# Altium PCB PCB.PcbDoc
Units mil, origin at the board's own origin, x right, y up, seen from the top; angles counter-clockwise.
Board outline 6000 x 4000 mil, 2 copper layers (Top Layer, Bottom Layer); 22 components, 26 nets, 109 pads, 2 vias.
Unrouted connection lines stored in the file: 15.
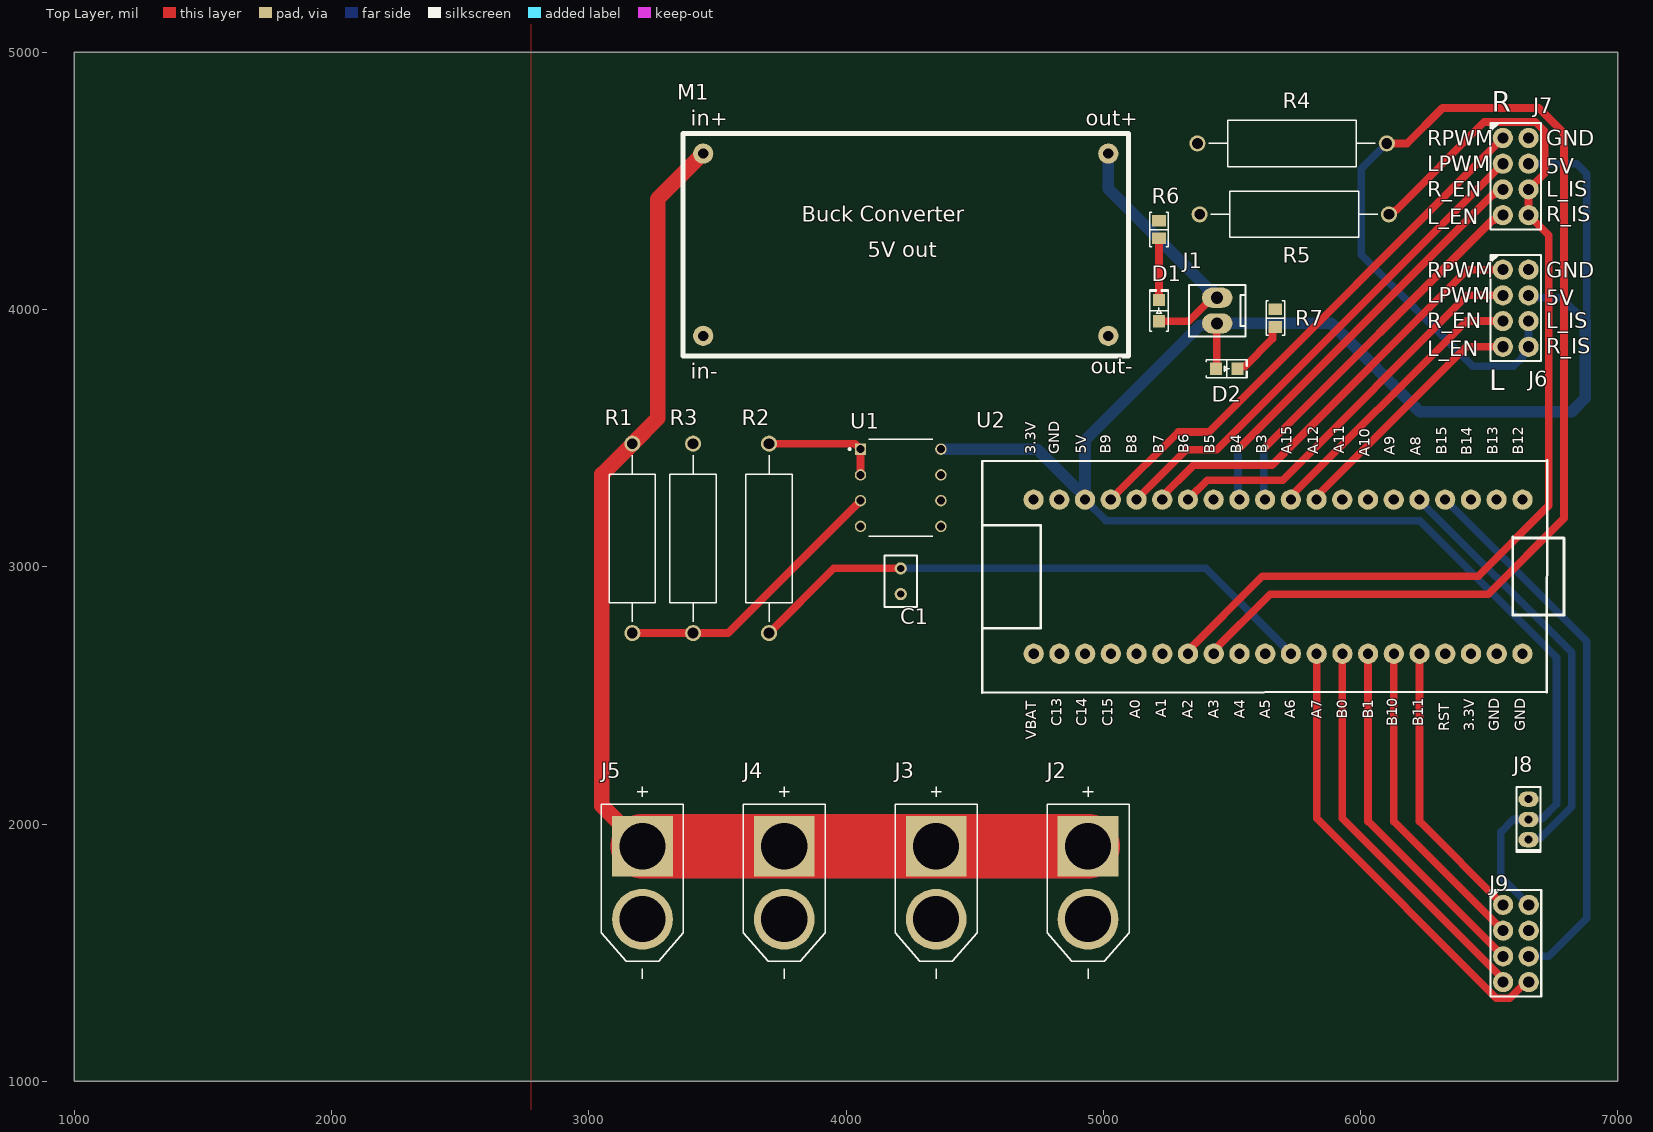
[diagram p0: Top Layer view]
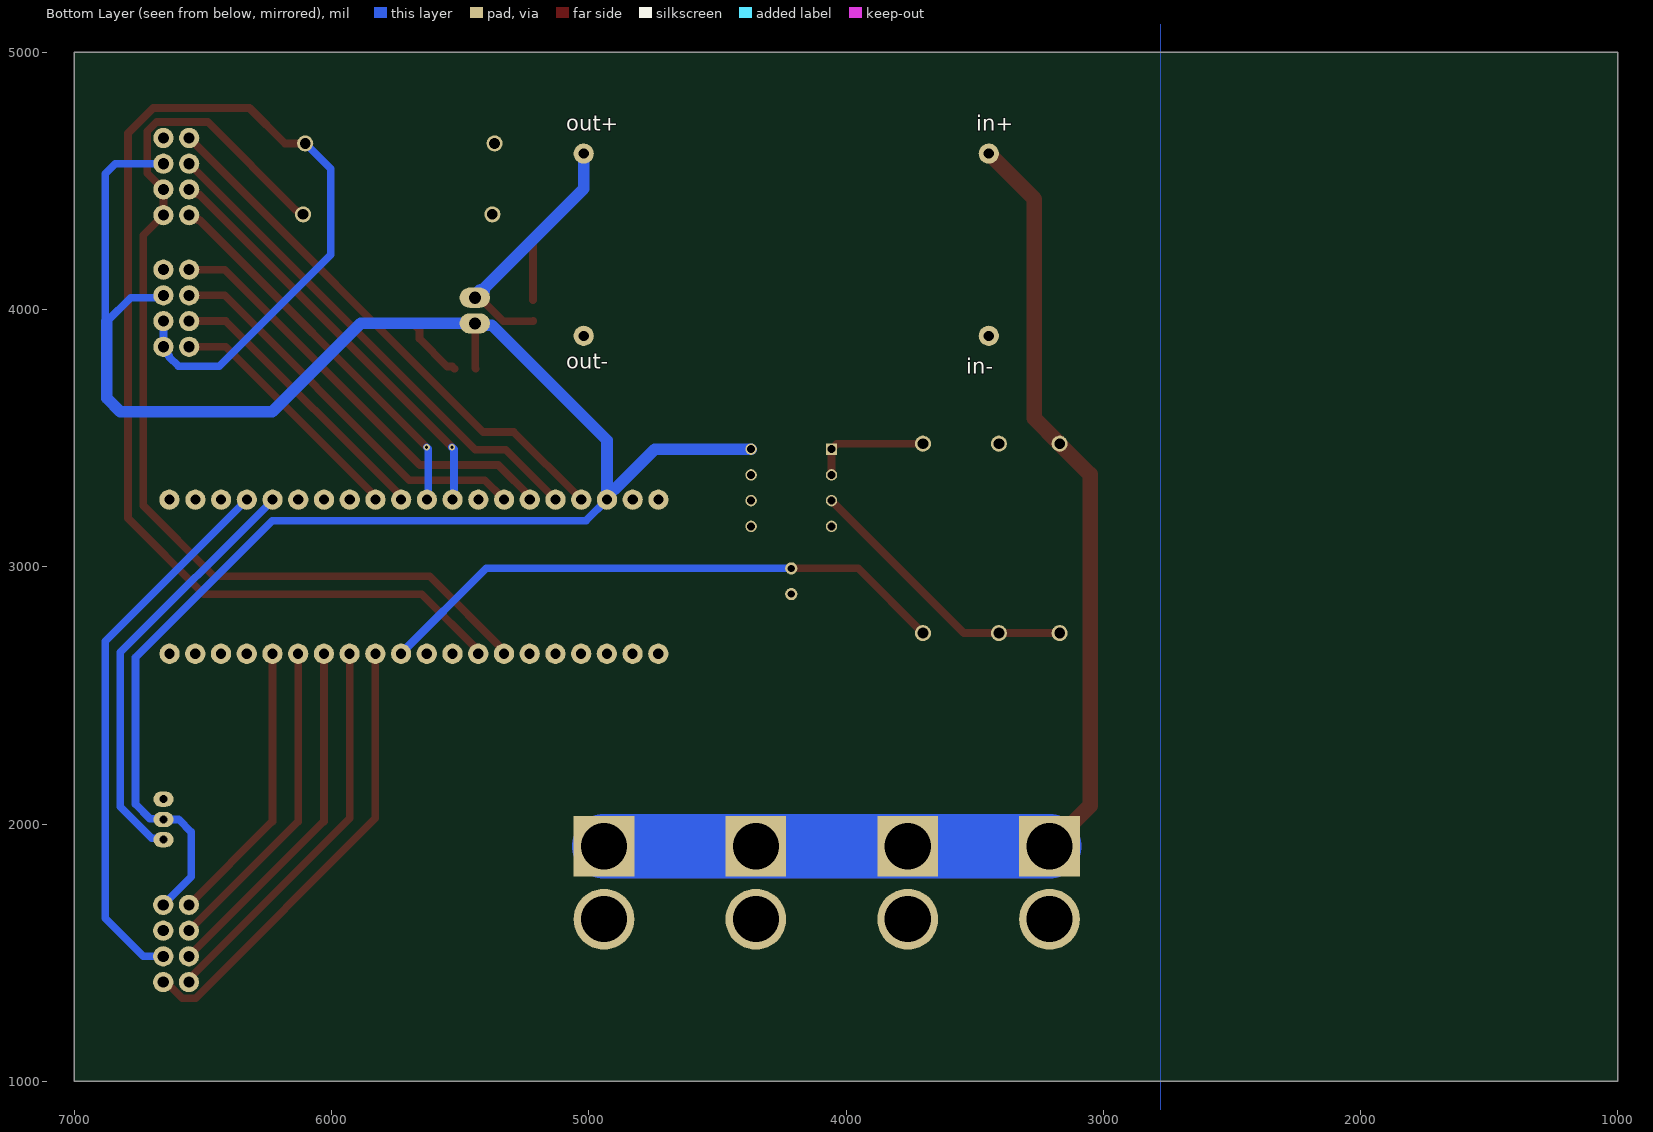
[diagram p1: Bottom Layer view, seen from below]
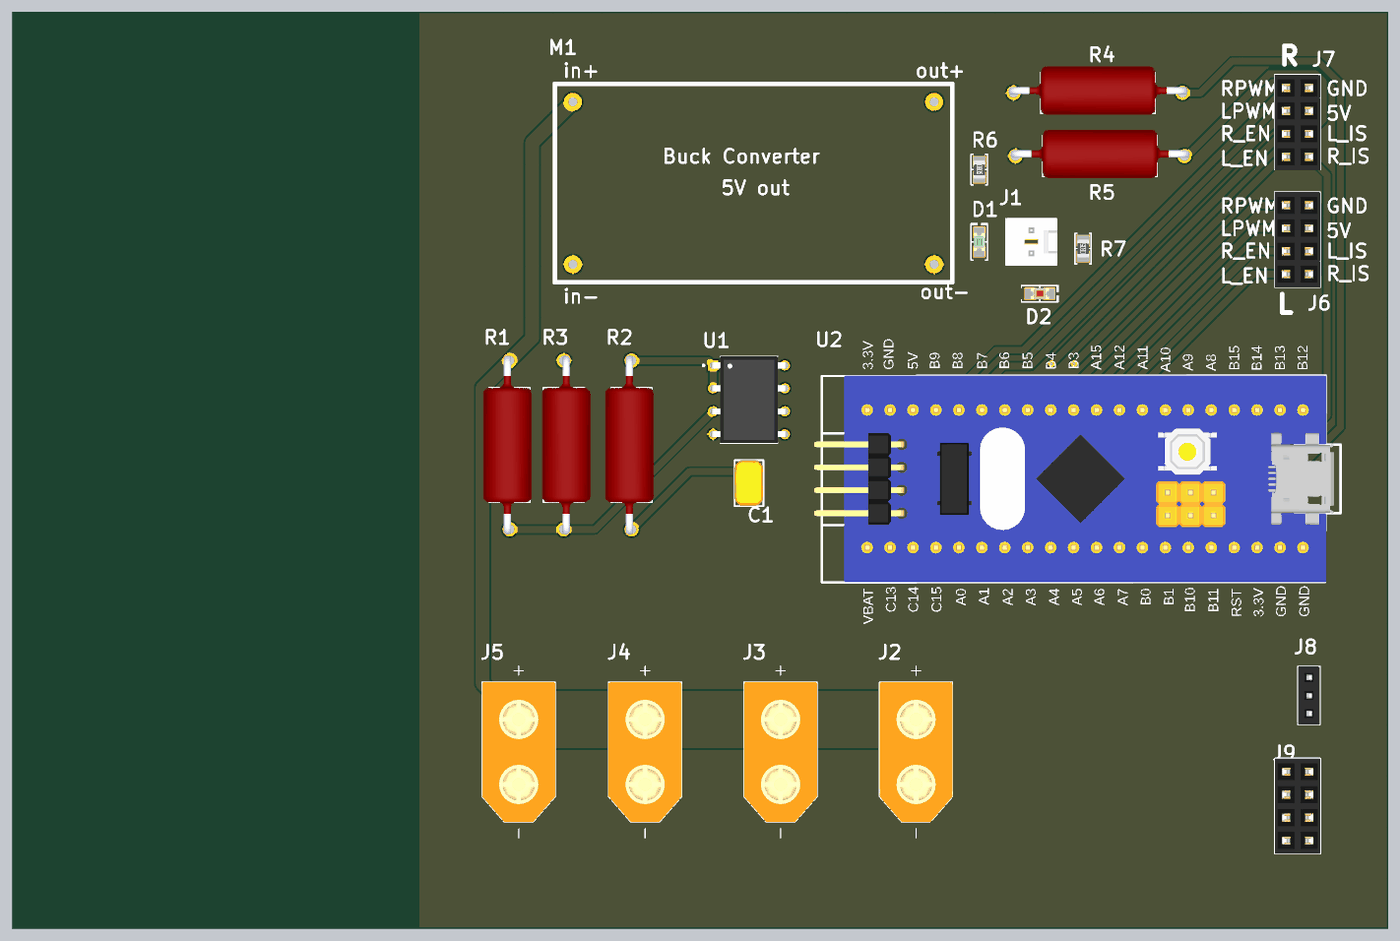
[diagram p2: 3D render of the assembled board from above, using the file's embedded part models]

## Layer stack, top to bottom
Top Solder: solder mask 0.4, Solder Resist, Dk 3.5
Top Layer: signal copper 1.4
Dielectric 1: dielectric 12.6, FR-4, Dk 4.8
Bottom Layer: signal copper 1.4
Bottom Solder: solder mask 0.4, Solder Resist, Dk 3.5

## Board outline
1000,1000 7000,1000 7000,5000 1000,5000

## Design rules (kind name [scope] priority, off if disabled: settings)
BoardOutlineClearance [All] p1: gap=7.87 ignorepadtopadclearanceinfootprint=FALSE
Clearance [All] p1: gap=8 ignorepadtopadclearanceinfootprint=FALSE except(9.84: Arc-Hole Track-Hole SMDPad-Hole THPad-Hole Via-Hole Fill-Hole Poly-Hole Region-Hole Text-Hole)
ComponentClearance [All] p1: gap=5 collisioncheckmode=3 verticalgap=5 showdistances=TRUE
DiffPairsRouting [All] p1: maxlimit=15 minlimit=8 mostfreqgap=8 toplayer_minwidth=8 toplayer_maxwidth=1000 toplayer_prefwidth=8 bottomlayer_minwidth=8 bottomlayer_maxwidth=1000 bottomlayer_prefwidth=8 maxuncoupledlength=500
Height [All] p1: minheight=0 maxheight=71497.94 prefheight=500
HoleSize [All] p1: absolutevalues=TRUE maxlimit=248.03 minlimit=11.81 maxpercent=80.000 minpercent=20.000
HoleToHoleClearance [All] p1: gap=9.84 allowstackedmicrovias=FALSE
MinimumAnnularRing [All] p1: minimumring=3
MinimumSolderMaskSliver [All] p1: minsoldermaskwidth=0
PlaneClearance [All] p1: clearance=8
PlaneConnect PlaneConnectPowerPads [InPadClass('PowerPads')] p1: planeconnectstyle=Direct reliefexpansion=20 reliefentries=4 reliefconductorwidth=10 reliefairgap=10
PlaneConnect [All] p2: pad.planeconnectstyle=Relief pad.reliefexpansion=11.81 pad.reliefentries=4 pad.reliefconductorwidth=8 pad.reliefairgap=8 via.planeconnectstyle=Direct via.reliefexpansion=11.81 via.reliefentries=4 via.reliefconductorwidth=5 via.reliefairgap=5
PolygonConnect PolygonConnectPowerPads [All vs (InPadClass('PowerPads'))] p1: connectstyle=Direct reliefconductorwidth=10 reliefentries=4 polygonreliefangle="90 Angle" airgapwidth=10
PolygonConnect [All] p2: thpad.connectstyle=Relief thpad.reliefconductorwidth=8 thpad.reliefentries=4 thpad.polygonreliefangle="90 Angle" thpad.airgapwidth=8 smdpad.connectstyle=Relief smdpad.reliefconductorwidth=8 smdpad.reliefentries=4 smdpad.polygonreliefangle="90 Angle" smdpad.airgapwidth=8 via.connectstyle=Direct via.reliefconductorwidth=5 via.reliefentries=4 via.polygonreliefangle="90 Angle" via.airgapwidth=5
RoutingVias [All] p1: holewidth=11.81 width=23.62 viastyle="Through Hole" minholewidth=11.81 minwidth=23.62 maxholewidth=23.62 maxwidth=259.84
SilkToSilkClearance [All] p1: silktosilkclearance=0
SilkToSolderMaskClearance [IsPad] p1: minsilkscreentomaskgap=5 clearancetoexposedcopper=TRUE
SolderMaskExpansion [All] p1: expansion=2.95 istentingtop=FALSE
SupplyNets "Schematic Supply Nets" [InNet('GND')] p1: voltage=0.000
Width [All] p1: maxlimit=1000 minlimit=8 preferedwidth=30 minimp=50.000000 maximp=50.000000 favimp=50.000000
20 further rules are at their usual default settings.

## Components (designator, comment, footprint, x,y, rotation, side; value= is the part's Value field where it differs from the comment)
C1 "100nF" C320C 4212.01,2944.29 r90 top
D1 "Green" "LED 0805_2012 GREEN" 5216.54,3996.06 r90 top
D2 "Red" "LED 0805_2012 RED" 5480.31,3769.68 r0 top
J1 "0022272021" "MOLEX KK 0022272021" 5442.91,3996.06 r90 top
J2 "PowerIn" AMASS_XT60-M 4940.94,1771.65 r270 top
J3 "MotorR" AMASS_XT60-M 4350.39,1771.65 r270 top
J4 "MotorL" AMASS_XT60-M 3759.84,1771.65 r270 top
J5 "ESC" AMASS_XT60-M 3208.66,1771.65 r270 top
J6 "MotorR" "HARWIN M20-7830445" 6603.54,4005.12 r0 top
J7 "MotorL" "HARWIN M20-7830445" 6603.54,4516.93 r0 top
J8 "NPPN031BFCN-RC" "SULLINS NPPN031BFCN" 6653.54,2017.72 r90 top
J9 "M20-7830442" "HARWIN M20-7830445" 6604.33,1535.43 r0 top
M1 "LM2596S" LM2596S 4232.28,4251.97 r0 top
R1 "150K" RESAD1869W81L1270D457 3169.29,3110.24 r90 top
R2 "1K" RESAD1869W81L1270D457 3700.79,3110.24 r90 top
R3 "20K" RESAD1869W81L1270D457 3405.51,3110.24 r270 top
R4 "10K" RESAD1869W81L1270D457 5734.31,4645.67 r0 top
R5 "10K" RESAD1869W81L1270D457 5742.76,4370.08 r0 top
R6 "220 Ohms" "RES 0805_2012" 5216.54,4311.02 r270 top
R7 "220 Ohms" "RES 0805_2012" 5669.29,3966.54 r90 top
U1 "TL072CPE4" DIP794W45P254L959H508Q8 4212.6,3307.09 r0 top
U2 "STM32F103C8T6" "STM32 BLUEPILL" 5452.76,2952.76 r90 top

## Footprints (in the part's own frame and the unit in brackets; to place one, negate y for a bottom-side part, rotate by r counter-clockwise, add the part's x,y. Pads: shape width x height; smd on the part's side, far side on the other; paste and mask are expansions set on the pad)
AMASS_XT60-M [mm]
  round 6 hole 4.55: N(3.6,0)
  rect 6x6 / inner round 6 / far side rect 6x6 hole 4.55: P(-3.6,0)
  silkscreen extent -9.5,-4.05 9.5,4.05, body extent -7.75,-4.05 7.75,4.05, height 16
C320C [mm]
  round 1.21 hole 0.71: 1(-1.285,-0.015) 2(1.255,-0.015)
  silkscreen extent -2.56,-1.61 2.52,1.58, body extent -2.54,-1.59 2.54,1.59, height 6.34
DIP794W45P254L959H508Q8 [mm]
  rect 1.13x1.13 / inner round 1.13 / far side rect 1.13x1.13 hole 0.78 mask+0.102: 1(-3.97,3.81)
  round 1.13 hole 0.78 mask+0.102: 2(-3.97,1.27) 3(-3.97,-1.27) 4(-3.97,-3.81) 5(3.97,-3.81) 6(3.97,-1.27) 7(3.97,1.27) 8(3.97,3.81)
  silkscreen extent -5.13,-4.79 3.17,4.79, body extent -4.15,-4.79 4.15,4.79, height 5.08
"HARWIN M20-7830445" [mm] "2.54mm DIL PC TAIL PIN HEADER ASSEMBLY"
  round 2 hole 1.1: 1(-1.27,3.81) 2(-1.27,1.27) 3(-1.27,-1.27) 4(-1.27,-3.81) 5(1.27,-3.81) 6(1.27,-1.27) 7(1.27,1.27) 8(1.27,3.81)
  silkscreen extent -2.5,-5.23 2.5,5.27, body extent -2.52,-5.28 2.52,5.28, height 8.5
"LED 0805_2012 GREEN" [mm] "Chip Diode, 2-Leads, Body 2.00x1.25mm, IPC Medium Density"
  rect 1.2x1.2 smd: 1(-1.05,0) 2(1.05,0)
  silkscreen extent -2.03,-0.9 2.03,0.9, body extent -1,-0.62 1,0.63, height 0.9
"LED 0805_2012 RED" [mm] "Chip Diode, 2-Leads, Body 2.00x1.25mm, IPC Medium Density"
  rect 1.2x1.2 smd: 1(-1.05,0) 2(1.05,0)
  silkscreen extent -2.03,-0.9 2.03,0.9, body extent -1,-0.62 1,0.63, height 0.9
LM2596S [mm]
  round 2 hole 1: 1(-20,9) 2(-20,-9) 3(20,9) 4(20,-9)
  silkscreen extent -22,-11 22,11
"MOLEX KK 0022272021" [mm]
  oval 2x3 hole 1.2: 1(-1.27,0) 2(1.27,0)
  silkscreen extent -2.54,-2.79 2.54,2.79, body extent -2.54,-2.9 2.54,2.9, height 11.7
"RES 0805_2012" [mm] "Chip Resistor, 2-Leads, Body 2.00x1.25mm, IPC Medium Density"
  rect 1.15x1.35 smd: 1(-0.875,0) 2(0.875,0)
  silkscreen extent -1.7,-0.9 1.7,0.9, body extent -1,-0.62 1,0.63, height 0.6
RESAD1869W81L1270D457 [mm]
  round 1.59 hole 1.06: 1(-9.349,0) 2(9.349,0)
  silkscreen extent -8.23,-2.28 8.23,2.28, body extent -9.93,-2.44 9.93,2.95, height 5.38
"STM32 BLUEPILL" [mm]
  round 2 hole 1: 1(7.828,-29.909) 2(7.828,-27.343) 3(7.828,-24.803) 4(7.828,-22.263) 5(7.828,-19.723) 6(7.828,-17.183) 7(7.828,-14.643) 8(7.828,-12.103) 9(7.828,-9.563) 10(7.828,-7.023) 11(7.828,-4.483) 12(7.828,-1.943) 13(7.828,0.597) 14(7.828,3.137) 15(7.828,5.677) 16(7.828,8.217) 17(7.828,10.757) 18(7.828,13.297) 19(7.828,15.837) 20(7.828,18.377) 21(-7.386,18.366) 22(-7.386,15.826) 23(-7.386,13.286) 24(-7.386,10.746) 25(-7.386,8.206) 26(-7.386,5.666) 27(-7.386,3.126) 28(-7.386,0.586) 29(-7.386,-1.954) 30(-7.386,-4.494) 31(-7.386,-7.034) 32(-7.386,-9.574) 33(-7.386,-12.114) 34(-7.386,-14.654) 35(-7.386,-17.194) 36(-7.386,-19.734) 37(-7.386,-22.274) 38(-7.386,-24.814) 39(-7.386,-27.354) 40(-7.386,-29.894)
  silkscreen extent -11.22,-34 11.69,23.43, body extent -11.18,-33.27 11.68,24.29, height 12.31
"SULLINS NPPN031BFCN" [mm]
  oval 1.5x2 hole 0.8: 1(-2,0) 2(0,0) 3(2,0)
  silkscreen extent -3.2,-1.2 3.2,1.2, body extent -3.25,-1.2 3.25,1.2, height 4.41

## Part data
C1: library part C320C104M5U5TA, "C320 C 100nF Ceramic Multilayer Capacitor, 50 VDC, +85degC, Z5U Dielec, +/-20%", Package="Radial KEMET", Check_prices=https://www.snapeda.com/parts/C320C104M5U5TA/KEMET/view-part/?ref=eda, MF=KEMET, MP=C320C104M5U5TA, SnapEDA_Link=https://www.snapeda.com/parts/C320C104M5U5TA/KEMET/view-part/?ref=snap
D1: library part APHCM2012ZGC/G-F01, "LED GREEN CLEAR 2SMD", Current - Test=20mA, Device Package="0805 (2012 Metric)", Lens Color=Colorless, Manufacturer=Kingbright, Millicandela Rating=700mcd, Supplier Device Package=2-SMD, Supplier Part Number 1=754-2119-1-ND, Voltage - Forward (Vf) (Typ)=3.2V, Color=Green, ComponentLink1Description=Datasheet, ComponentLink1URL=http://www.kingbrightusa.com/images/catalog/SPEC/APHCM2012ZGC-G-F01.pdf, ComponentLink2Description="DigiKey Link", ComponentLink2URL=https://www.digikey.com/en/products/detail/kingbright/APHCM2012ZGC-G-F01/7318972, Configuration=Independent, Height (Max)=0.50mm, LastUpdated="2024-06-03 8:00:29 PM", Lens Size="1.25mm x 1.20mm", Lens Style="Rectangle with Flat Top", Lens Transparency=Clear, Lifecycle Status=Active, Minimum Order=1, Mounting Type="Surface Mount", Package / Case="0805 (2012 Metric)", Packaging=TapeAndReel, Part Number=APHCM2012ZGC/G-F01, Part Status=Active, PartId=255, Price=0.25, Series=-, Size / Dimension="2.00mm L x 1.25mm W", Supplier 1=DigiKey, Viewing Angle=110°, Wavelength - Dominant=525nm, Wavelength - Peak=520nm
D2: library part 5990110007F, "LED RED 0805 SMD", Current - Test=20mA, Device Package="0805 (2012 Metric)", Lens Color=0.80mm, Manufacturer=Dialight, Millicandela Rating=29mcd, Supplier Device Package=0805, Supplier Part Number 1=350-4353-1-ND, Voltage - Forward (Vf) (Typ)=2.1V, Color=Red, ComponentLink1Description=Datasheet, ComponentLink1URL=http://www.dialightsignalsandcomponents.com/Assets/Brochures_And_Catalogs/Indication/CBI_SMD_new/Dialight_CBI_data_599-0805_Apr2018.pdf, ComponentLink2Description="DigiKey Link", ComponentLink2URL=https://www.digikey.com/en/products/detail/dialight/5990110007F/9385408, Configuration=Standard, Height (Max)=0.80mm, LastUpdated="2024-06-03 8:00:07 PM", Lens Size="1.40mm x 1.25mm", Lens Style="Rectangle with Flat Top", Lifecycle Status=Active, Minimum Order=1, Mounting Type="Surface Mount", Package / Case="0805 (2012 Metric)", Packaging=TapeAndReel, Part Number=5990110007F, Part Status=Active, PartId=308, Price=0.04, Series=599, Size / Dimension="2.00mm L x 1.25mm W", Supplier 1=DigiKey, Viewing Angle=140°, Wavelength - Dominant=633nm
J1: "CONN HEADER VERT 2POS 2.54MM", Insulation Color=Natural, Manufacturer=Molex, Material Flammability Rating="UL94 V-0", Supplier Part Number 1=WM4111-ND, ComponentLink1Description=Datasheet, ComponentLink1URL=https://www.molex.com/pdm_docs/sd/022272021_sd.pdf, ComponentLink2Description="DigiKey Link", ComponentLink2URL=http://digikey.com/product-detail/en/molex/0022272021/WM4111-ND/1130577, Connector Type=Header, Contact Finish - Mating=Tin, Contact Finish - Post=Tin, Contact Finish Thickness - Mating="100.0µin (2.54µm)", Contact Length - Mating="0.295\" (7.49mm)", Contact Length - Post="0.140\" (3.56mm)", Contact Material=Brass, Contact Shape=Square, Contact Type="Male Pin", Fastening Type="Friction Lock", Insulation Height="0.461\" (11.70mm)", Insulation Material="Polyamide (PA), Nylon", LastUpdated="2020-01-12 11:51:43 PM", Lifecycle Status=Active, Minimum Order=1, Mounting Type="Through Hole", Number of Positions=2, Number of Positions Loaded=All, Number of Rows=1, Overall Contact Length="0.560\" (14.22mm)", Packaging=Bulk, Part Number=0022272021, Part Status=Active, PartId=76, Pitch - Mating="0.100\" (2.54mm)", Price=0.27, Series="KK 6410", Shrouding="Shrouded - 1 Wall", Style="Board to Cable/Wire", Supplier 1=DigiKey, Termination=Solder
J2 J3 J4 J5: library part XT60-M, "Plug; DC supply; XT60; male; PIN: 2; for cable; soldered; 30A; 500V", Package=Package, Check_prices=https://www.snapeda.com/parts/XT60-M/AMASS/view-part/?ref=eda, MF=AMASS, MP=XT60-M, SnapEDA_Link=https://www.snapeda.com/parts/XT60-M/AMASS/view-part/?ref=snap
J6 J7: library part M20-7830442, "CONN RCPT 8POS 0.1 GOLD PCB", Current Rating (Amps)=3A, Insulation Color=Black, Manufacturer="Harwin Inc.", Material Flammability Rating="UL94 V-0", Operating Temperature="-40°C ~ 105°C", Supplier Part Number 1=952-1789-ND, ComponentLink1Description=Datasheet, ComponentLink1URL=https://cdn.harwin.com/pdfs/C001XX_M20_Series_Connectors.pdf, ComponentLink2Description="DigiKey Link", ComponentLink2URL=http://digikey.com/product-detail/en/harwin-inc/M20-7830442/952-1789-ND/3727758, Connector Type=Receptacle, Contact Finish - Mating=Gold, Contact Finish - Post=Tin, Contact Finish Thickness - Mating=Flash, Contact Length - Post="0.118\" (3.00mm)", Contact Type="Female Socket", Fastening Type=Push-Pull, Insulation Height="0.335\" (8.51mm)", LastUpdated="2022-09-21 7:04:26 PM", Lifecycle Status=Active, Mated Stacking Heights="11.04mm, 12.63mm", Minimum Order=1, Mounting Type="Through Hole", Number of Positions=8, Number of Positions Loaded=All, Number of Rows=2, Packaging=Tube, Part Number=M20-7830442, Part Status=Active, Pitch - Mating="0.100\" (2.54mm)", Price=1.36, Row Spacing - Mating="0.100\" (2.54mm)", Series=M20, Style="Board to Board or Cable", Supplier 1=DigiKey, Termination=Solder
J8: "CONN HDR 3POS 0.079 GOLD PCB", Current Rating (Amps)=2A, Insulation Color=Black, Manufacturer="Sullins Connector Solutions", Material Flammability Rating="UL94 V-0", Operating Temperature="-40°C ~ 105°C", Supplier Part Number 1=S5751-03-ND, ComponentLink1Description=Datasheet, ComponentLink1URL=https://drawings-pdf.s3.amazonaws.com/10483.pdf, ComponentLink2Description="DigiKey Link", ComponentLink2URL=https://www.digikey.com/en/products/detail/sullins-connector-solutions/NPPN031BFCN-RC/804805, Connector Type=Header, Contact Finish - Mating=Gold, Contact Finish - Post=Gold, Contact Finish Thickness - Mating=Flash, Contact Length - Post="0.094\" (2.40mm)", Contact Type="Female Socket", Fastening Type=Push-Pull, Insulation Height="0.173\" (4.40mm)", LastUpdated="2022-06-21 2:42:20 PM", Lifecycle Status=Active, Minimum Order=1, Mounting Type="Through Hole", Number of Positions=3, Number of Positions Loaded=All, Number of Rows=1, Packaging=Tube, Part Number=NPPN031BFCN-RC, Part Status=Active, Pitch - Mating="0.079\" (2.00mm)", Price=0.25, Series=-, Style="Board to Board", Supplier 1=DigiKey, Termination=Solder
J9: "CONN RCPT 8POS 0.1 GOLD PCB", Current Rating (Amps)=3A, Insulation Color=Black, Manufacturer="Harwin Inc.", Material Flammability Rating="UL94 V-0", Operating Temperature="-40°C ~ 105°C", Supplier Part Number 1=952-1789-ND, ComponentLink1Description=Datasheet, ComponentLink1URL=https://cdn.harwin.com/pdfs/C001XX_M20_Series_Connectors.pdf, ComponentLink2Description="DigiKey Link", ComponentLink2URL=http://digikey.com/product-detail/en/harwin-inc/M20-7830442/952-1789-ND/3727758, Connector Type=Receptacle, Contact Finish - Mating=Gold, Contact Finish - Post=Tin, Contact Finish Thickness - Mating=Flash, Contact Length - Post="0.118\" (3.00mm)", Contact Type="Female Socket", Fastening Type=Push-Pull, Insulation Height="0.335\" (8.51mm)", LastUpdated="2022-09-21 7:04:26 PM", Lifecycle Status=Active, Mated Stacking Heights="11.04mm, 12.63mm", Minimum Order=1, Mounting Type="Through Hole", Number of Positions=8, Number of Positions Loaded=All, Number of Rows=2, Packaging=Tube, Part Number=M20-7830442, Part Status=Active, Pitch - Mating="0.100\" (2.54mm)", Price=1.36, Row Spacing - Mating="0.100\" (2.54mm)", Series=M20, Style="Board to Board or Cable", Supplier 1=DigiKey, Termination=Solder
R1 R2 R3 R4 R5: library part ALSR0310K00FE12, Package=None, Availability=Unavailable, MP=ALSR0310K00FE12, Price=None
R6 R7: library part ESR10EZPF2200, "RES SMD 220 OHM 1% 0.4W 0805", Device Package="0805 (2012 Metric)", Manufacturer="Rohm Semiconductor", Operating Temperature="-55°C ~ 155°C", Power (Watts)="0.4W, 2/5W", Ratings=AEC-Q200, Supplier Device Package=0805, Supplier Part Number 1=RHM220AECT-ND, Temperature Coefficient=±100ppm/°C, Tolerance=±1%, ComponentLink1Description=Datasheet, ComponentLink1URL=https://www.rohm.com/datasheet/ESR01MZPF/esr-e, ComponentLink2Description="DigiKey Link", ComponentLink2URL=https://www.digikey.com/en/products/detail/rohm-semiconductor/ESR10EZPF2200/1983511, Composition="Thick Film", Features="Automotive AEC-Q200, Pulse Withstanding", Height - Seated (Max)="0.026\" (0.65mm)", LastUpdated="2024-02-08 9:02:37 PM", Lifecycle Status=Active, Minimum Order=1, Number of Terminations=2, Package / Case="0805 (2012 Metric)", Packaging=TapeAndReel, Part Number=ESR10EZPF2200, Part Status=Active, PartId=28037, Price=0.02, Resistance="220 Ohms", Series=ESR, Size / Dimension="0.079\" L x 0.049\" W (2.00mm x 1.25mm)", Supplier 1=DigiKey
U1: "Dual Low-Noise JFET-Input General-Purpose Operational Amplifier 8-PDIP 0 to 70", Package="PDIP-8 Texas", Check_prices=https://www.snapeda.com/parts/TL072CPE4/Texas+Instruments/view-part/?ref=eda, MF="Texas Instruments", MP=TL072CPE4, SnapEDA_Link=https://www.snapeda.com/parts/TL072CPE4/Texas+Instruments/view-part/?ref=snap
U2: library part BluePill, "Designed By @Alixahedi"

## Via types
v1: diameter 23.62, hole 11.81, Top Layer to Bottom Layer, 2 vias

## Nets (pads, with @x,y where several pads share a name; then routed paths per layer and width w, separated by ;. In a path a pad name is that pad's centre, name@x,y a point inside that pad or via, vN(x,y) a via of type N, cw(c..) or ccw(c..) an arc to the next point about the centre after c; other vN are vias at no path point)
5V: D2.1 J1.1 J6.7 J7.7 J8.2 J9.8 U1.8 U2.18 | length 7913.8
  Top Layer w30: D2.1 5440.94,3771.65 5440.94,3944.09 J1.1
  Bottom Layer w30: U2.18 5011.08,3179.13 6230.31,3179.13 6761.81,2647.64 6761.81,2076.77 6705.77,2020.73 6656.56,2020.73 J8.2 6594.49,2017.72 6545.28,1968.5 6545.28,1794.49 J9.8 ; J6.7 6662.87,4045.79 6780.98,4045.79 6873.03,3953.74 6879.92,3946.85 6879.92,4527.56 6840.55,4566.93 J7.7
  Bottom Layer w45: U1.8 4743.67,3457.09 4900.99,3299.76 ; U2.18@4929.26,3295.42 4929.26,3492.25 5376.62,3939.61 5436.46,3939.61 J1.1 5886.61,3946.06 6230.31,3602.36 6820.87,3602.36 6873.03,3654.53 6873.03,3953.74
  Bottom Layer w60: U2.18 U2.18@4929.26,3266.03
BatMonitor: C1.2 R2.1 U2.31 | length 2262.1
  Top Layer w30: R2.1 3952.3,2993.7 C1.2
  Bottom Layer w30: C1.2 5399.06,2993.7 U2.31@5724.05,2668.72
BLDC_Con: J9.5 U2.32 | length 1780
  Top Layer w30: U2.32 5829.68,2021.88 6528.5,1323.06 6580.17,1323.06 6642.53,1385.43 J9.5
ESC_Signal: J8.1 U2.5 | length 1657.4
  Bottom Layer w30: U2.5@6229.26,3258.93 6820.87,2667.32 6820.87,2066.93 6698.47,1944.54 6659.1,1944.54 J8.1
Flip_switch: J9.6 U2.4 | length 2142.7
  Bottom Layer w30: U2.4 6879.92,2710.29 6879.92,1633.07 6732.28,1485.43 J9.6
GND: C1.1 J2.N J3.N J4.N J5.N J6.8 J7.8 J8.3 J9.7 M1.2 M1.4 R3.1 R4.1 R5.1 R6.1 R7.2 U1.4 U2.19 U2.39 U2.40
IS1: J6.5 J6.6 R4.2 U2.28 | length 5290.2
  Top Layer w30: U2.28@5424.05,2668.72 5649.03,2893.7 6496.06,2893.7 6791.34,3188.98 6791.34,4685.04 6692.91,4783.46 6318.9,4783.46 6181.1,4645.67 R4.2@6122.05,4645.67
  Bottom Layer w30: R4.2 6003.51,4546.81 6003.51,4213.03 6437.01,3779.53 6594.49,3779.53 6632.15,3817.19 6632.15,3820.54 6653.54,3841.93 J6.5 J6.6
IS2: J7.5 J7.6 R5.2 U2.27 | length 3926.2
  Top Layer w30: U2.27@5324.05,2668.72 5618.59,2963.26 6457.35,2963.26 6732.28,3238.19 6732.28,4288.19 J7.5 J7.6 6715.91,4529.3 6715.91,4692.76 6679.38,4729.3 6481.27,4729.3 6138.35,4386.38 6135.93,4386.38 6119.63,4370.08 R5.2
L_EN1: J6.4 U2.9 | length 973.2
  Top Layer w30: U2.9@5823.62,3267.72 6411.02,3855.12 J6.4
L_EN2: J7.4 U2.11 | length 1496.9
  Top Layer w30: v1(5629.92,3464.57) 6513.25,4347.9 6521.33,4347.9 6540.35,4366.93 J7.4
  Bottom Layer w30: U2.11@5623.62,3267.72 5623.62,3458.27 v1(5629.92,3464.57)
LeftJoy: J9.4 U2.33 | length 1553.9
  Top Layer w30: U2.33 5929.68,2021.88 6554.33,1397.23 J9.4@6554.33,1383.02 ; J9.4@6563.37,1388.19 J9.4@6574.82,1399.64
LPWM1: J6.2 U2.14 | length 1556.1
  Top Layer w30: U2.14@5323.62,3267.72 5335.42,3267.72 5404.32,3336.61 5697.24,3336.61 6415.75,4055.12 J6.2
LPWM2: J7.2 U2.16 | length 1968.1
  Top Layer w30: U2.16@5123.62,3267.72 5135.42,3267.72 5322.43,3454.72 5441.34,3454.72 J7.2
NetD1_1: D1.1 J1.2 M1.3 | length 1060.3
  Top Layer w30: D1.1@5215.94,3955.32 D1.1 5331.89,3954.72 5423.23,4046.06 J1.2
  Bottom Layer w45: M1.3 5019.69,4469.29 5406.36,4082.62 5406.36,4072.06 5440.86,4037.56 J1.2@5451.41,4037.56
  Bottom Layer w60: J1.2@5419.64,4069.33 5419.64,4054.72 5428.3,4046.06 J1.2
NetD1_2: D1.2 R6.2 | length 239.2
  Top Layer w30: D1.2 R6.2
NetD2_2: D2.2 R7.1 | length 237.4
  Top Layer w30: D2.2 5530.28,3778.31 5549.96,3778.31 5657.72,3886.06 5657.72,3924.45 5665.35,3932.09 R7.1
NetR1_1: R1.1 R3.2 U1.3 | length 1100.3
  Top Layer w30: R1.1 R3.2 3541.4,2742.18 U1.3
NetR2_2: R2.2 U1.1 U1.2 | length 464.3
  Top Layer w30: R2.2 4035.1,3478.29 U1.1 U1.2
R_EN1: J6.3 U2.10 | length 1114.7
  Top Layer w30: U2.10@5723.62,3267.72 6411.02,3955.12 J6.3
R_EN2: J7.3 U2.12 | length 1637.4
  Top Layer w30: v1(5531.5,3464.57) 6514.04,4447.11 6520.54,4447.11 6540.35,4466.93 J7.3
  Bottom Layer w30: U2.12@5523.62,3267.72 5523.62,3456.69 v1(5531.5,3464.57)
RightJoy: J9.3 U2.34 | length 1393.8
  Top Layer w30: U2.34 6029.68,2010.08 J9.3
Robot_Kill: J9.1 U2.36 | length 1111.8
  Top Layer w30: U2.36 6229.68,2010.08 J9.1@6554.93,1684.84
RPWM1: J6.1 U2.15 | length 1697.5
  Top Layer w30: U2.15@5223.62,3267.72 5351.57,3395.67 5656.3,3395.67 6415.75,4155.12 J6.1
RPWM2: J7.1 U2.17 | length 2109.5
  Top Layer w30: U2.17@5023.62,3267.72 5035.42,3267.72 5291.32,3523.62 5410.24,3523.62 J7.1
VCC: J2.P J3.P J4.P J5.P M1.1 R1.2 | length 6385.1
  Top Layer w60: R1.2@3169.29,3477.58 3051.18,3359.47 3051.18,2070.87 J5.P ; R1.2 3267.72,3576.71 3267.72,4429.13 M1.1
  Top Layer w250: J5.P J4.P J3.P J2.P
  Bottom Layer w250: J5.P J3.P J2.P
Weapon_Kill: J9.2 U2.35 | length 1252.4
  Top Layer w30: U2.35 6129.68,2010.08 J9.2
pads on no net: U1.5 U1.6 U1.7 U2.1 U2.2 U2.3 U2.6 U2.7 U2.8 U2.13 U2.20 U2.21 U2.22 U2.23 U2.24 U2.25 U2.26 U2.29 U2.30 U2.37 U2.38

## Polygon pours and split planes (outlines as drawn)
GND on Bottom Layer "NONET_L02_P000" (solid, shelved, pour order 0): 2775.59,5187.01 2814.96,5226.38 7175.2,5226.38 7175.2,836.61 7086.61,748.03 6968.5,866.14 2775.59,866.14
GND on Top Layer "NONET_L01_P001" (solid, shelved, pour order 1): 2775.59,5187.01 2814.96,5226.38 7175.2,5226.38 7175.2,836.61 7133.86,866.14 6968.5,866.14 2775.59,866.14

## Silkscreen, mask and mechanical layers (free items; w line width, h text height)
Top Overlay:
  text "R" at 6511.22,4769.09 h80
  text "RPWM" at 6260,4635.98 h60
  text "GND" at 6722.6,4635.98 h60
  text "LPWM" at 6260,4537.56 h60
  text "5V" at 6722.6,4527.72 h60
  text "R_EN" at 6260,4439.29 h60
  text "L_IS" at 6722.6,4439.29 h60
  text "R_IS" at 6722.6,4340.86 h60
  text "L_EN" at 6260,4331.02 h60
  text "RPWM" at 6260,4124.17 h60
  text "GND" at 6722.6,4124.17 h60
  text "LPWM" at 6260,4025.75 h60
  text "5V" at 6722.6,4015.91 h60
  text "R_EN" at 6260,3927.48 h60
  text "L_IS" at 6722.6,3927.48 h60
  text "R_IS" at 6722.6,3829.05 h60
  text "L_EN" at 6260,3819.21 h60
  text "L" at 6501.38,3686.42 h80
Bottom Solder:
  lines w200: 3208.66,1913.39 3759.84,1913.39 4350.39,1913.39 4940.94,1913.39

## Text inside footprints (layer, text, board x,y; h text height)
M1: Top Overlay "5V out" at 4084.8,4202.91 h60; Top Overlay "Buck Converter" at 3828.9,4340.71 h60; Top Overlay "in+" at 3395.83,4714.72 h60; Top Overlay "out+" at 4931.26,4714.72 h60; Top Overlay "in-" at 3395.83,3730.47 h60; Top Overlay "out-" at 4950.94,3750.16 h60; Bottom Overlay "in-" at 3533.31,3750.16 h60; Bottom Overlay "out-" at 5088.43,3769.84 h60; Bottom Overlay "out+" at 5088.43,4695.04 h60; Bottom Overlay "in+" at 3493.94,4695.04 h60
U2: Top Overlay "5V" at 4948,3439.96 h70 r90; Top Overlay "B9" at 5043,3439.96 h70 r90; Top Overlay "B8" at 5143,3439.96 h70 r90; Top Overlay "3.3V" at 4752,3437.76 h70 r90; Top Overlay "GND" at 4842,3437.76 h70 r90; Top Overlay "B15" at 6349,3435.36 h70 r90; Top Overlay "A8" at 6248,3432.4 h70 r90; Top Overlay "A11" at 5949.76,3439.1 h70 r90; Top Overlay "B3" at 5649,3439.96 h70 r90; Top Overlay "A9" at 6147,3433.6 h70 r90; Top Overlay "A15" at 5747,3437.8 h70 r90; Top Overlay "A12" at 5848.76,3437.8 h70 r90; Top Overlay "A10" at 6049,3427.8 h70 r90; Top Overlay "B5" at 5448,3439.96 h70 r90; Top Overlay "B14" at 6446.76,3434.16 h70 r90; Top Overlay "B7" at 5249.76,3439.96 h70 r90; Top Overlay "B4" at 5549.76,3438.66 h70 r90; Top Overlay "B6" at 5347,3441.16 h70 r90; Top Overlay "B13" at 6548,3434.96 h70 r90; Top Overlay "B12" at 6646.76,3435.36 h70 r90; Top Overlay "VBAT" at 4752.76,2327.81 h70 r90; Top Overlay "C15" at 5051,2379.96 h70 r90; Top Overlay "C13" at 4852,2379.96 h70 r90; Top Overlay "C14" at 4950,2379.96 h70 r90; Top Overlay "A0" at 5157,2409.9 h70 r90; Top Overlay "A2" at 5361.76,2409.9 h70 r90; Top Overlay "A1" at 5257.76,2412.7 h70 r90; Top Overlay "A3" at 5462,2409.9 h70 r90; Top Overlay "A4" at 5563.76,2409.9 h70 r90; Top Overlay "A5" at 5663,2409.9 h70 r90; Top Overlay "3.3V" at 6455,2359.96 h70 r90; Top Overlay "B10" at 6156,2379.96 h70 r90; Top Overlay "B11" at 6257.76,2379.96 h70 r90; Top Overlay "A6" at 5761,2409.9 h70 r90; Top Overlay "A7" at 5862.76,2409.9 h70 r90; Top Overlay "B0" at 5963,2409.96 h70 r90; Top Overlay "B1" at 6063.76,2409.96 h70 r90; Top Overlay "GND" at 6553,2359.96 h70 r90; Top Overlay "GND" at 6654,2359.96 h70 r90; Top Overlay "RST" at 6358,2359.96 h70 r90